# Altium PCB PCB1.PcbDoc
Units mil, origin at the board's own origin, x right, y up, seen from the top; angles counter-clockwise.
Board outline 910 x 566.25 mil, 2 copper layers (Top Layer, Bottom Layer), stack 65.792 mil thick; 8 components, 8 nets, 57 pads, 18 vias.
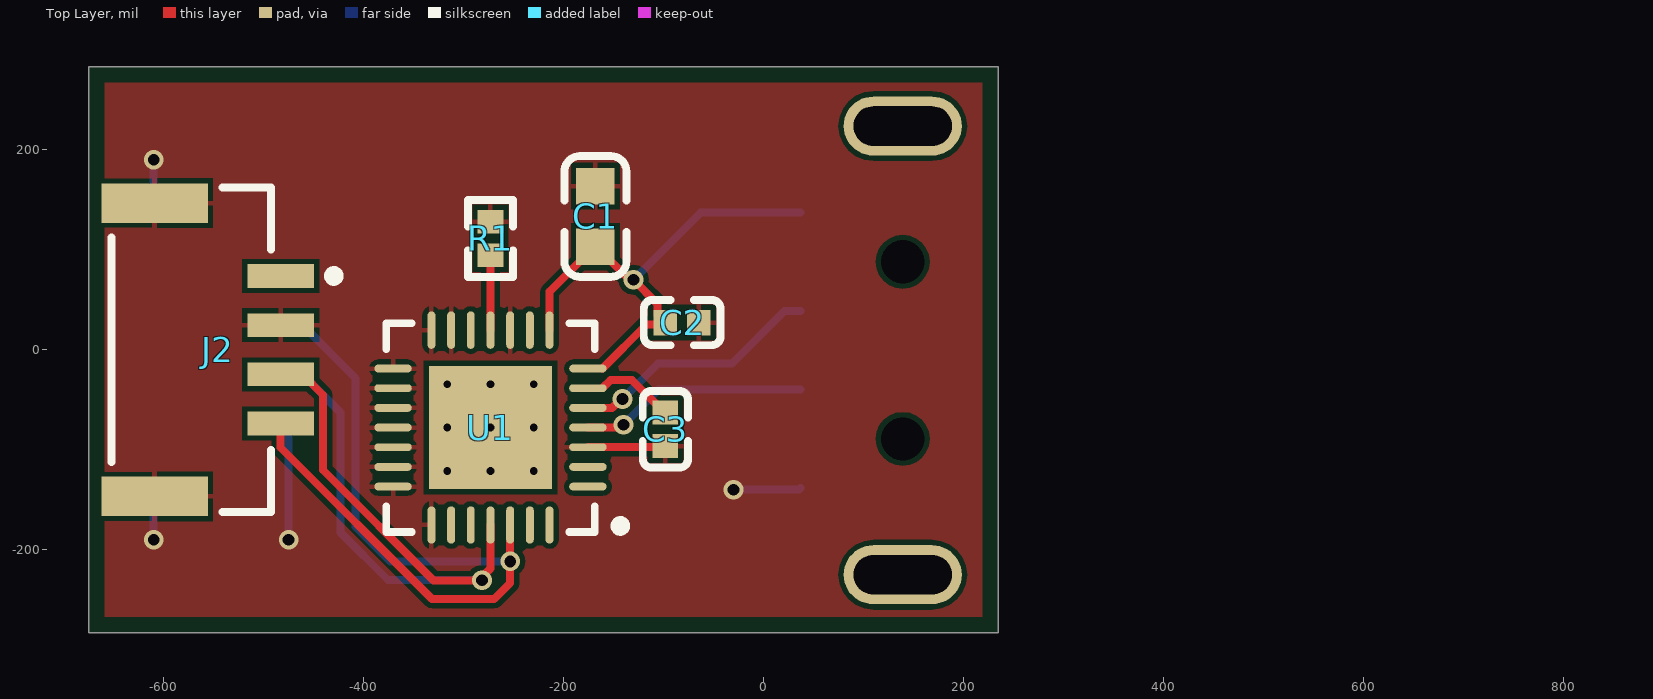
[diagram p0: Top Layer view]
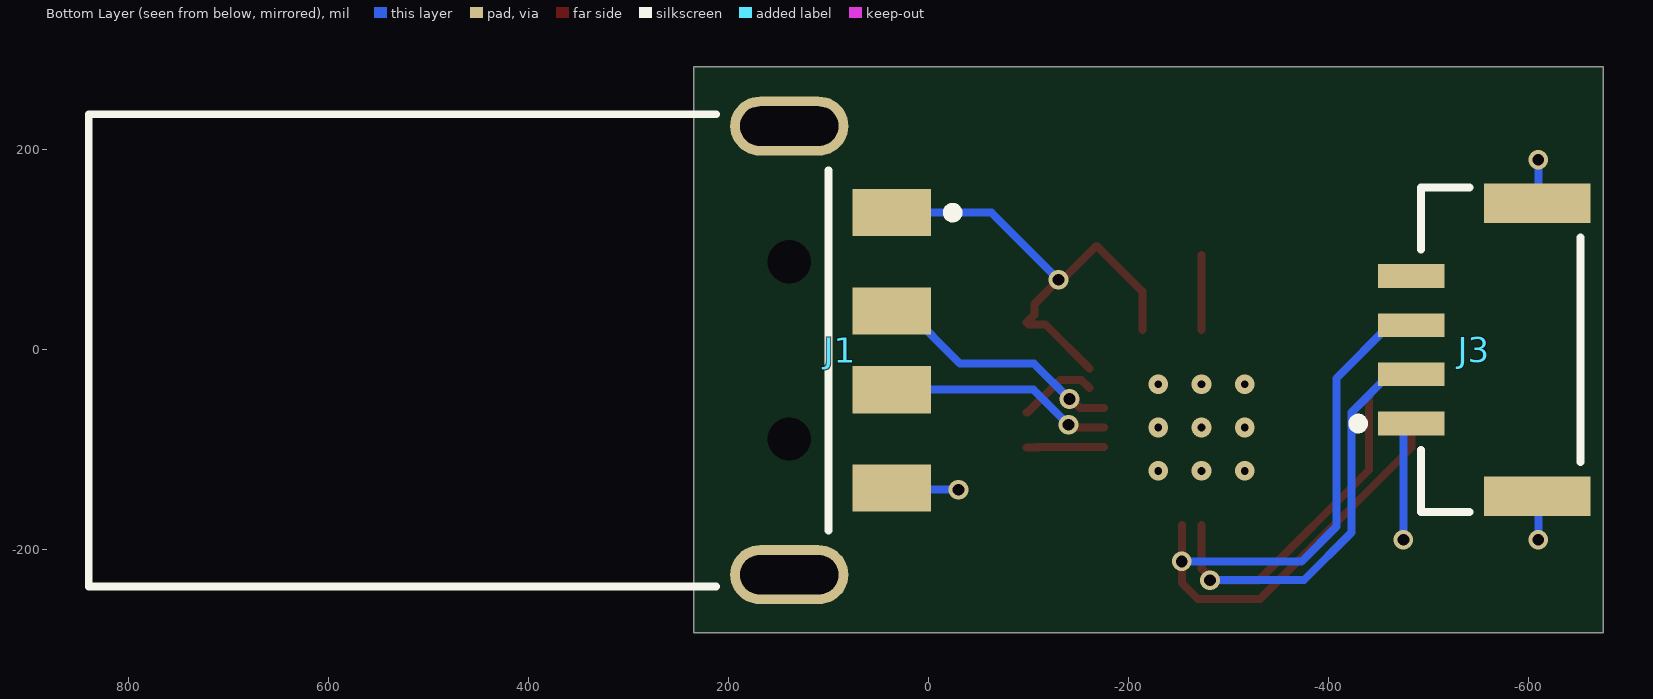
[diagram p1: Bottom Layer view, seen from below]

## Layer stack, top to bottom
Top Solder: solder mask 1, SM-001, Dk 4
Top Layer: signal copper 1.4
Dielectric 1: dielectric 62.9921, FR-4, Dk 4.5
Bottom Layer: signal copper 1.4
Bottom Solder: solder mask 1, SM-001, Dk 4

## Board outline
-675,-283.12 -675,283.12 235,283.12 235,-283.12

## Design rules (kind name [scope] priority, off if disabled: settings)
BoardOutlineClearance [All] p1: gap=15.75 ignorepadtopadclearanceinfootprint=FALSE
Clearance [All] p1: gap=5 ignorepadtopadclearanceinfootprint=TRUE except(0: Arc-Text Track-Text SMDPad-Text THPad-Text Via-Text Fill-Text Poly-Text Region-Text Text-Text)
HoleSize [All] p1: absolutevalues=TRUE maxlimit=248.03 minlimit=7.87 maxpercent=80.000 minpercent=20.000
MinimumAnnularRing [All] p1: minimumring=7.87
MinimumSolderMaskSliver [All] p1: minsoldermaskwidth=3.94
PlaneClearance [All] p1: clearance=5
PlaneConnect [All] p1: pad.planeconnectstyle=Relief pad.reliefexpansion=5 pad.reliefentries=4 pad.reliefconductorwidth=5 pad.reliefairgap=5 via.planeconnectstyle=Direct via.reliefexpansion=20 via.reliefentries=4 via.reliefconductorwidth=10 via.reliefairgap=10
PolygonConnect [All] p1: thpad.connectstyle=Relief thpad.reliefconductorwidth=5 thpad.reliefentries=4 thpad.polygonreliefangle="45 Angle" thpad.airgapwidth=5 smdpad.connectstyle=Relief smdpad.reliefconductorwidth=5 smdpad.reliefentries=4 smdpad.polygonreliefangle="90 Angle" smdpad.airgapwidth=5 via.connectstyle=Direct via.reliefconductorwidth=10 via.reliefentries=4 via.polygonreliefangle="90 Angle" via.airgapwidth=10
RoutingVias [All] p1: holewidth=11.81 width=19.68 viastyle="Through Hole" minholewidth=11.81 minwidth=19.68 maxholewidth=39.37 maxwidth=78.74
SilkToSilkClearance [All] p1: silktosilkclearance=5.91
SilkToSolderMaskClearance [IsPad] p1: minsilkscreentomaskgap=5.91 clearancetoexposedcopper=TRUE
SolderMaskExpansion [All] p1: expansion=4 istentingtop=FALSE
Width [All] p1: maxlimit=100 minlimit=5 preferedwidth=8 minimp=50.000000 maximp=50.000000 favimp=50.000000
24 further rules are at their usual default settings.

## Components (designator, comment, footprint, x,y, rotation, side; value= is the part's Value field where it differs from the comment)
C1 "1uF" 0603_C -168.1,133.37 r270 top
C2 "100nF" 0402_C -81.37,27.18 r180 top
C3 "100nF" 0402_C -98.1,-79.56 r90 top
J1 "480-37-1000" MOLX-480-37-1000_V 88.08,-0.62 r270 bottom
J2 "SM04B-GHS-TB(LF)(SN)" FP-SM04B-GHS-TB_LF_SN-MFG -572.48,0 r270 top
J3 "SM04B-GHS-TB(LF)(SN)" FP-SM04B-GHS-TB_LF_SN-MFG -572.48,0 r90 bottom
R1 "10KΩ" 0402_R -273.1,111.32 r90 top
U1 "CP2102-GMR" SLAB-QFN-28-3125x3125TP_M -273.1,-77.82 r180 top

## Footprints (in the part's own frame and the unit in brackets; to place one, negate y for a bottom-side part, rotate by r counter-clockwise, add the part's x,y. Pads: shape width x height; smd on the part's side, far side on the other; paste and mask are expansions set on the pad)
0402_C [mm]
  rect 0.6x0.65 smd mask+0.051: 1(-0.425,0) 2(0.425,0)
  silkscreen extent -0.97,-0.58 0.97,0.58, body extent -0.48,-0.3 0.52,0.3, height 0.2
0402_R [mm]
  rect 0.6x0.65 smd mask+0.051: 1(-0.425,0) 2(0.425,0)
  silkscreen extent -0.97,-0.58 0.97,0.58, body extent -0.57,-0.27 0.58,0.28, height 0.41
0603_C [mm]
  rect 0.93x0.98 smd: 1(-0.77,0) 2(0.77,0)
  silkscreen extent -1.53,-0.79 1.54,0.79, body extent -0.8,-0.4 0.8,0.4, height 0.3
FP-SM04B-GHS-TB_LF_SN-MFG [mm]
  rect 0.6x1.7 smd paste+0 mask+0: 1(-1.875,2.275) 2(-0.625,2.275) 3(0.625,2.275) 4(1.875,2.275)
  rect 1x2.7 smd paste+0 mask+0: 5(-3.725,-0.925) 6(3.725,-0.925)
  silkscreen extent -4.13,-2.02 4.13,3.75, body extent -4.33,-2.37 4.33,3.22, height 0.25
MOLX-480-37-1000_V [mm] "CONN, 4-Leads, Body 12x18.8mm"
  rect 1.2x2 smd: 1(-3.5,1.3) 2(-1,1.3) 3(1,1.3) 4(3.5,1.3)
  oval 1.5x3 hole 1 slot 2.5 at 90 deg: 5(-5.7,-1.3) 6(5.7,-1.3)
  round 0.5 hole 1.1 unplated: MH1(-2.25,-1.3) MH2(2.25,-1.3)
  silkscreen extent -6,-19.1 6,2.97, body extent -6.35,-19.08 6.35,2.2, height 3.07
SLAB-QFN-28-3125x3125TP_M [mm] "QFN, 28-Leads, Body 5x5mm, Pitch 0.5mm, Thermal Pad 3.13x3.13mm, IPC Low Density"
  oval 0.95x0.2 smd: 1(-2.475,1.5) 2(-2.475,1) 3(-2.475,0.5) 4(-2.475,0) 5(-2.475,-0.5) 6(-2.475,-1) 7(-2.475,-1.5) 15(2.475,-1.5) 16(2.475,-1) 17(2.475,-0.5) 18(2.475,0) 19(2.475,0.5) 20(2.475,1) 21(2.475,1.5)
  oval 0.2x0.95 smd: 8(-1.5,-2.475) 9(-1,-2.475) 10(-0.5,-2.475) 11(0,-2.475) 12(0.5,-2.475) 13(1,-2.475) 14(1.5,-2.475) 22(1.5,2.475) 23(1,2.475) 24(0.5,2.475) 25(0,2.475) 26(-0.5,2.475) 27(-1,2.475) 28(-1.5,2.475)
  rect 3.13x3.13 smd: 29(0,0)
  silkscreen extent -3.42,-2.65 2.65,2.65, body extent -2.5,-2.5 2.5,2.5, height 1

## Part data
C1: library part "0603 1uF (105) 10% 50V", "贴片电容, 1uF (105) 10% 50V", Package=0603, SuppliersPartNumber=C15849, ComponentLink1Description=供应商链接, ComponentLink1URL=http://www.szlcsc.com/product/details_16531.html, Supplier=LC
C2 C3: library part "0402 100nF (104) 10% 16V", "贴片电容, 100nF (104) 10% 16V", Package=0402, SuppliersPartNumber=C1525, ComponentLink1Description=供应商链接, ComponentLink1URL=http://www.szlcsc.com/product/details_1877.html, Supplier=LC
J1: library part CMP-1676-00005-1, "Universal Serial Bus (USB) Shielded I/O Plug, Type A, Right Angle Connector, 1.5 A, -20 to 85 degC, 4-Pin SMD, RoHS, Tray", Case Code (Imperial)=0603, Case Code (Metric)=1608, Max Operating Temperature="155 degC", Min Operating Temperature="-55 degC", Package Quantity=5000, Power Rating="100 mW", Resistance="1 mohm", Tolerance=1%, Voltage Rating="50 V", Case\Package=0603, ComponentLink1Description="Manufacturer URL", ComponentLink1URL=http://www.molex.com/, ComponentLink2Description=Datasheet, ComponentLink2URL=http://www.molex.com/pdm_docs/sd/480371000_sd.pdf, DatasheetVersion="Rev. D, 06/2004", Height="0.45 mm", Length="1.6 mm", Mount="Surface Mount", PackageDescription="4-Pin Surface Mount Device, Body 12 x 18.8 mm", PackageReference=480-37-1000, Packaging="Tape and Reel", Pins=2, REACH SVHC="No SVHC", RoHSCompliant=true, Voltage Rating (DC)="50 V", Width="0.8 mm"
J2 J3: library part CMP-17439-000411-1, "CONN HEADER SMD R/A 4POS 1.25MM", Current Rating=1A, Housing Color=Natural, Voltage Rating=50V, Contact Material=Bronze, Contact Plating=Tin, Housing Material=Nylon, Lead Free="Lead Free", Mount="Surface Mount", Number of Contacts=4, Number of Positions=4, Number of Rows=1, Orientation="Right Angle", Packaging="Cut Tape", Pitch=1.25mm, REACH SVHC="No SVHC", Series=GH, Termination=Solder
R1: library part "0402 10KΩ (1002) 1%", "贴片电阻, 10KΩ (1002) ±1%", Package=0402, SuppliersPartNumber=C25744, ComponentLink1Description=供应商链接, ComponentLink1URL=http://www.szlcsc.com/product/details_26487.html, Supplier=LC
U1: library part CMP-2000-04924-1, "Single-Chip USB to URAT Bridge, 3.3 V, -40 to 85 degC, 28-Pin QFN, RoHS, Tape and Reel", Manufacturer="Silicon Labs", Operating Supply Voltage (Max)=3.6V, Operating Supply Voltage (Min)=3V, Operating Supply Voltage (Typ)=3.3V, Operating Temperature (Max)=85C, Operating Temperature (Min)=-40C, Operating Temperature Classification=Industrial, Package Description="28-Pin Quad-Flat No-Leads Package, Body 5 x 5 mm, Pitch 0.5 mm", Package Reference=QFN-28, Package Type=QFNEP, Supply Current=26mA, Data Rate=1000kbps, Datasheet URL=http://www.mouser.com/ds/2/368/CP2102-9-247052.pdf, Datasheet Version="Rev. 1.6, 12/2013", Interface Circuit Standard 1=RS-232, Manufacturer URL=http://www.silabs.com/, Mounting=SurfaceMount, Number of Channels=1, Package URL=http://www.silabs.com/Support%20Documents/TechnicalDocs/C8051T61x.pdf, Packaging=TapeandReel, Pin Count=28, Rad Hardened=No, Transmitter and Receiver FIFO Counter=No

## Via types
v1: diameter 19.68, hole 11.81, Top Layer to Bottom Layer, tented both sides, 9 vias
v2: diameter 19.68, hole 7.87, Top Layer to Bottom Layer, 9 vias

## Nets (pads, with @x,y where several pads share a name; then routed paths per layer and width w, separated by ;. In a path a pad name is that pad's centre, name@x,y a point inside that pad or via, vN(x,y) a via of type N, cw(c..) or ccw(c..) an arc to the next point about the centre after c; other vN are vias at no path point)
GND: C1.1 C2.1 C3.1 J1.4 J2.2 J2.5 J2.6 J3.1 J3.5 J3.6 R1.2 U1.3 U1.10 U1.13 U1.14 U1.15 U1.16 U1.17 U1.18 U1.19 U1.20 U1.21 U1.22 | length 349
  Top Layer w8: U1.3 -108.77,-97.51 -109.09,-97.82 C3.1@-98.1,-97.82
  Bottom Layer w8: v1(-610,-190) -610,-147.75 J3.5 ; v1(-610,190) -610,147.75 J3.6 ; v1(-475,-190) J3.1@-475,-74.45 ; v1(-30,-140) 35.31,-140 J1.4
NetC1_2: C1.2 C2.2 J1.1 U1.7 U1.8 | length 486.3
  Top Layer w8: U1.8 -214.05,58.09 -169.09,103.05 C1.2 -167.12,103.05 v1@-132.03,67.97 ; U1.7@-160.96,-18.71 -117.23,25.03 -100.25,25.03 C2.2 -105.91,34.99 -105.91,45.91 v1(-130,70)
  Bottom Layer w8: v1(-130,70) -62.82,137.18 J1.1
NetC3_2: C3.2 U1.6 | length 79.5
  Top Layer w8: U1.6@-160.96,-38.39 -153.06,-30.49 -131.42,-30.49 -99.09,-62.82 C3.2
NetJ1_2: J1.2 U1.5 | length 252.7
  Top Layer w8: U1.5 -151.51,-58.14 -142.71,-49.33 v1(-140.98,-49.33)
  Bottom Layer w8: v1(-140.98,-49.33) -105.63,-13.98 -31.59,-13.98 21.15,38.75 J1.2
NetJ1_3: J1.3 U1.4 | length 228.2
  Top Layer w8: U1.4 -175.6,-77.76 -145.92,-77.76 -143.16,-75 v1(-140,-75)
  Bottom Layer w8: v1(-140,-75) -104.99,-39.99 J1.3
NetR1_1: R1.1 U1.11 | length 75
  Top Layer w8: U1.11 R1.1
Rx: J2.3 J3.2 U1.25 | length 746.5
  Top Layer w8: J2.3 -461.26,-24.61 -440.45,-45.42 -440.45,-120.47 -330.1,-230.82 -281.91,-230.82 v1(-281.6,-230.52) -281.6,-227.36 -273.1,-218.86 U1.25
  Bottom Layer w8: J3.2 -461.26,-24.61 -423.1,-62.77 -423.1,-182.82 -375.41,-230.52 v1(-281.6,-230.52)
Tx: J2.4 J3.3 U1.26 | length 795.4
  Top Layer w8: J2.4 -482.92,-98.01 -331.56,-249.36 -269.36,-249.36 -253.42,-233.42 U1.26
  Bottom Layer w8: J3.3 -461.26,24.61 -408.1,-28.55 -408.1,-176.9 -373.32,-211.68 v1(-253.42,-211.68)
pads on no net: J1.5 J1.6 J1.MH1 J1.MH2 J2.1 J3.4 U1.1 U1.2 U1.9 U1.12 U1.23 U1.24 U1.27 U1.28 U1.29
copper on no net:
  other v2: -316.41,-121.13 -273.1,-121.13 -229.8,-121.13 -316.41,-77.82 -273.1,-77.82 -229.8,-77.82 -316.41,-34.52 -273.1,-34.52 -229.8,-34.52

## Polygon pours and split planes (outlines as drawn)
GND on Top Layer "GND_L01_P000" (solid, pour order 0): -2708.1,-2682.82 3291.9,-2682.82 3291.9,1317.18 -2708.1,1317.18

## Silkscreen, mask and mechanical layers (free items; w line width, h text height)
Mechanical 1:
  the board outline again, w10

## Text inside footprints (layer, text, board x,y; h text height)
J1: Mechanical 13 "PCB EDGE" at 239.26,-50.62 h19.68 r90